# Altium PCB PCB.PcbDoc
Units mm, origin at the board's own origin, x right, y up, seen from the top; angles counter-clockwise.
Board outline 38.61 x 38.61 mm, 2 copper layers (Top Layer, Bottom Layer), stack 1.571 mm thick; 10 components, 100 nets, 222 pads, 11 vias.
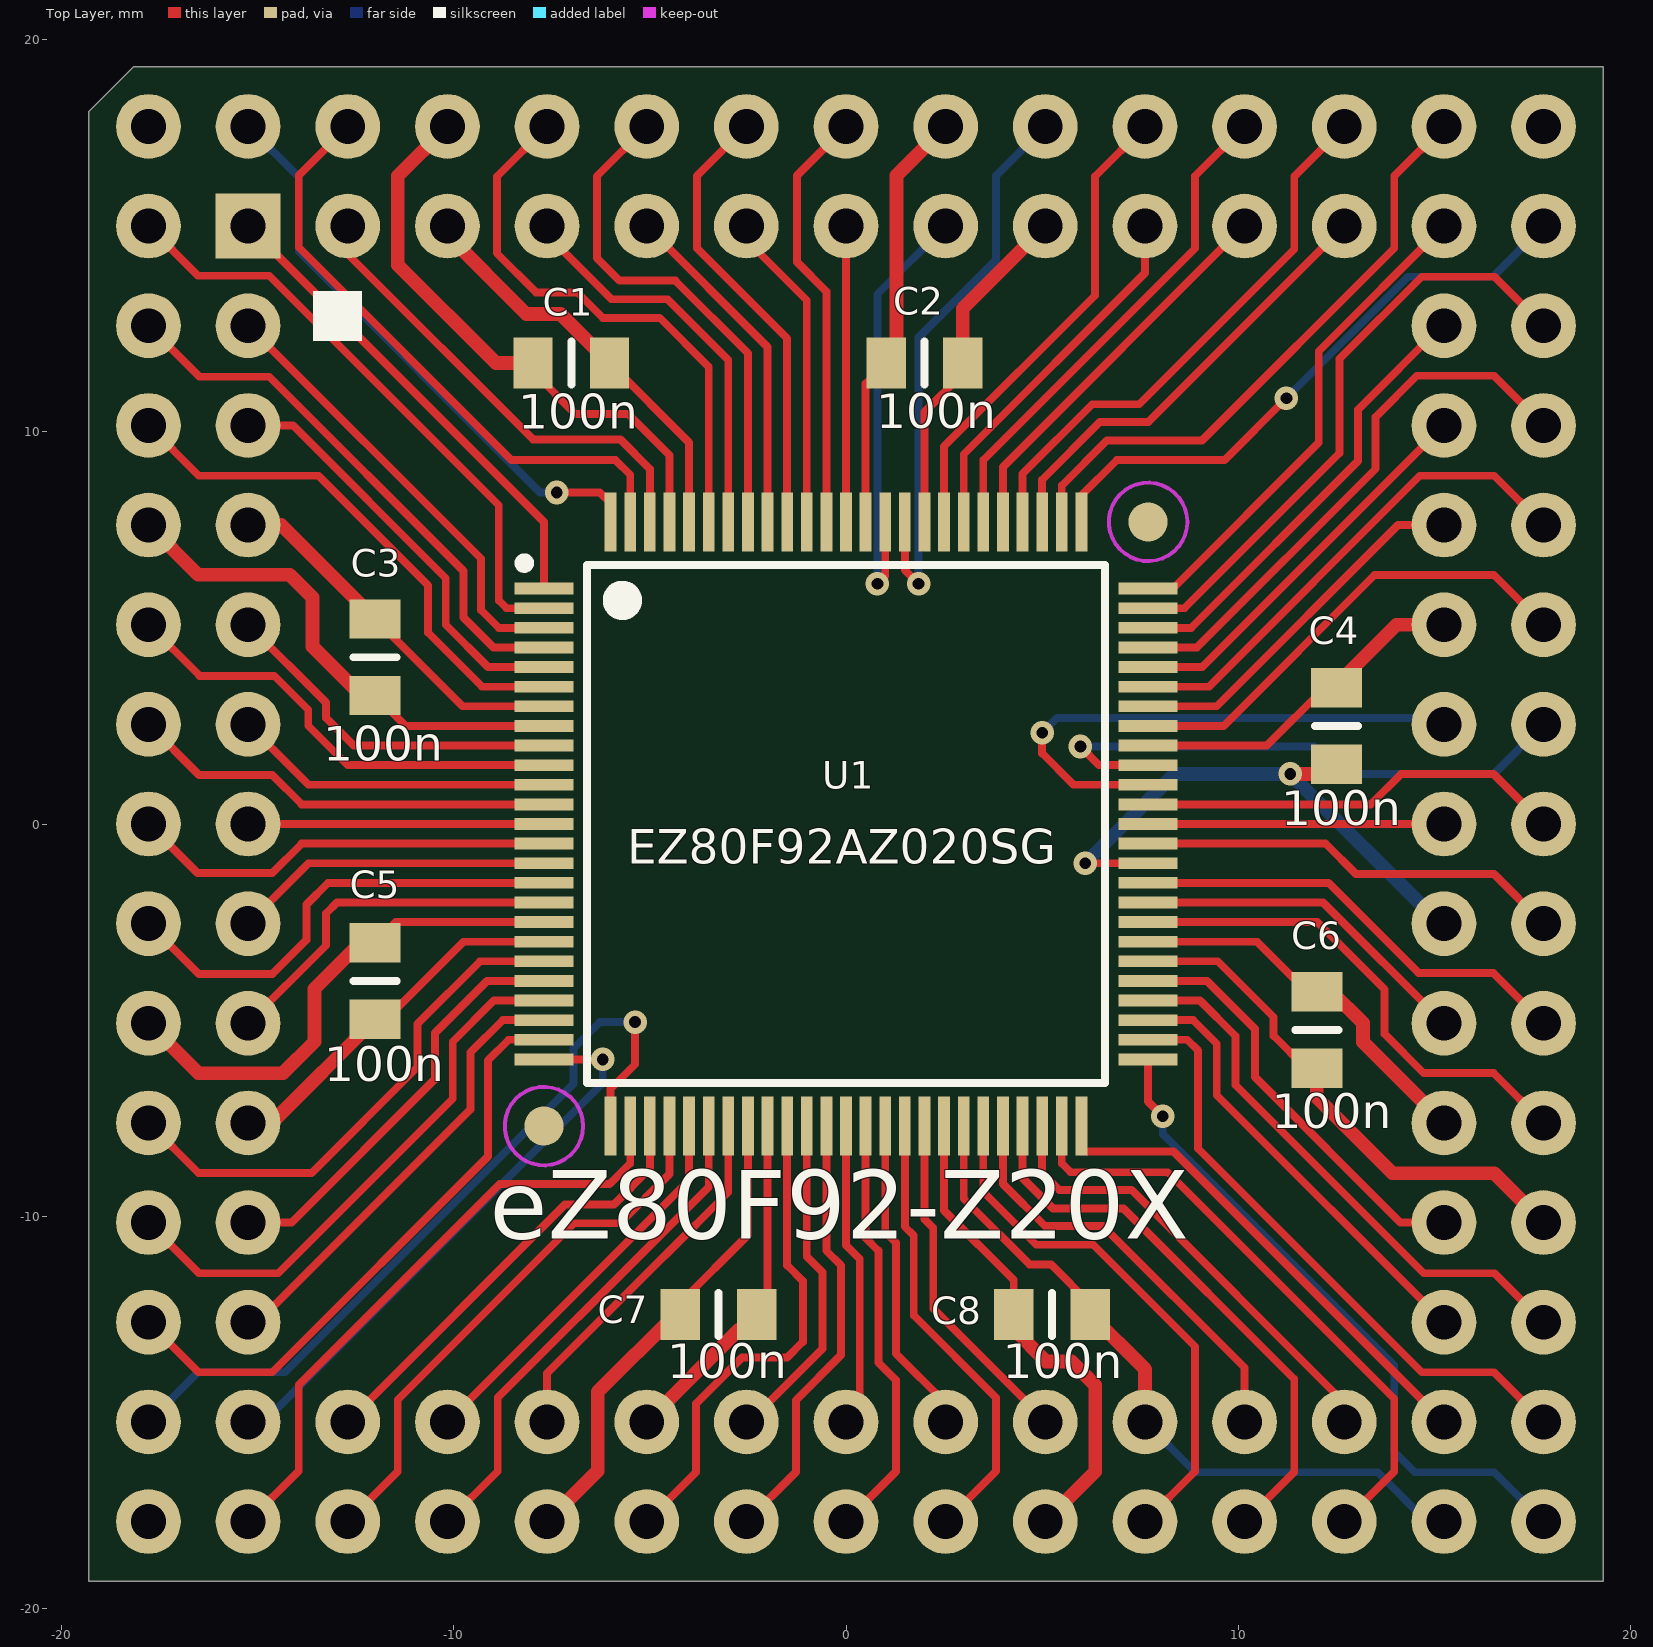
[diagram p0: Top Layer view]
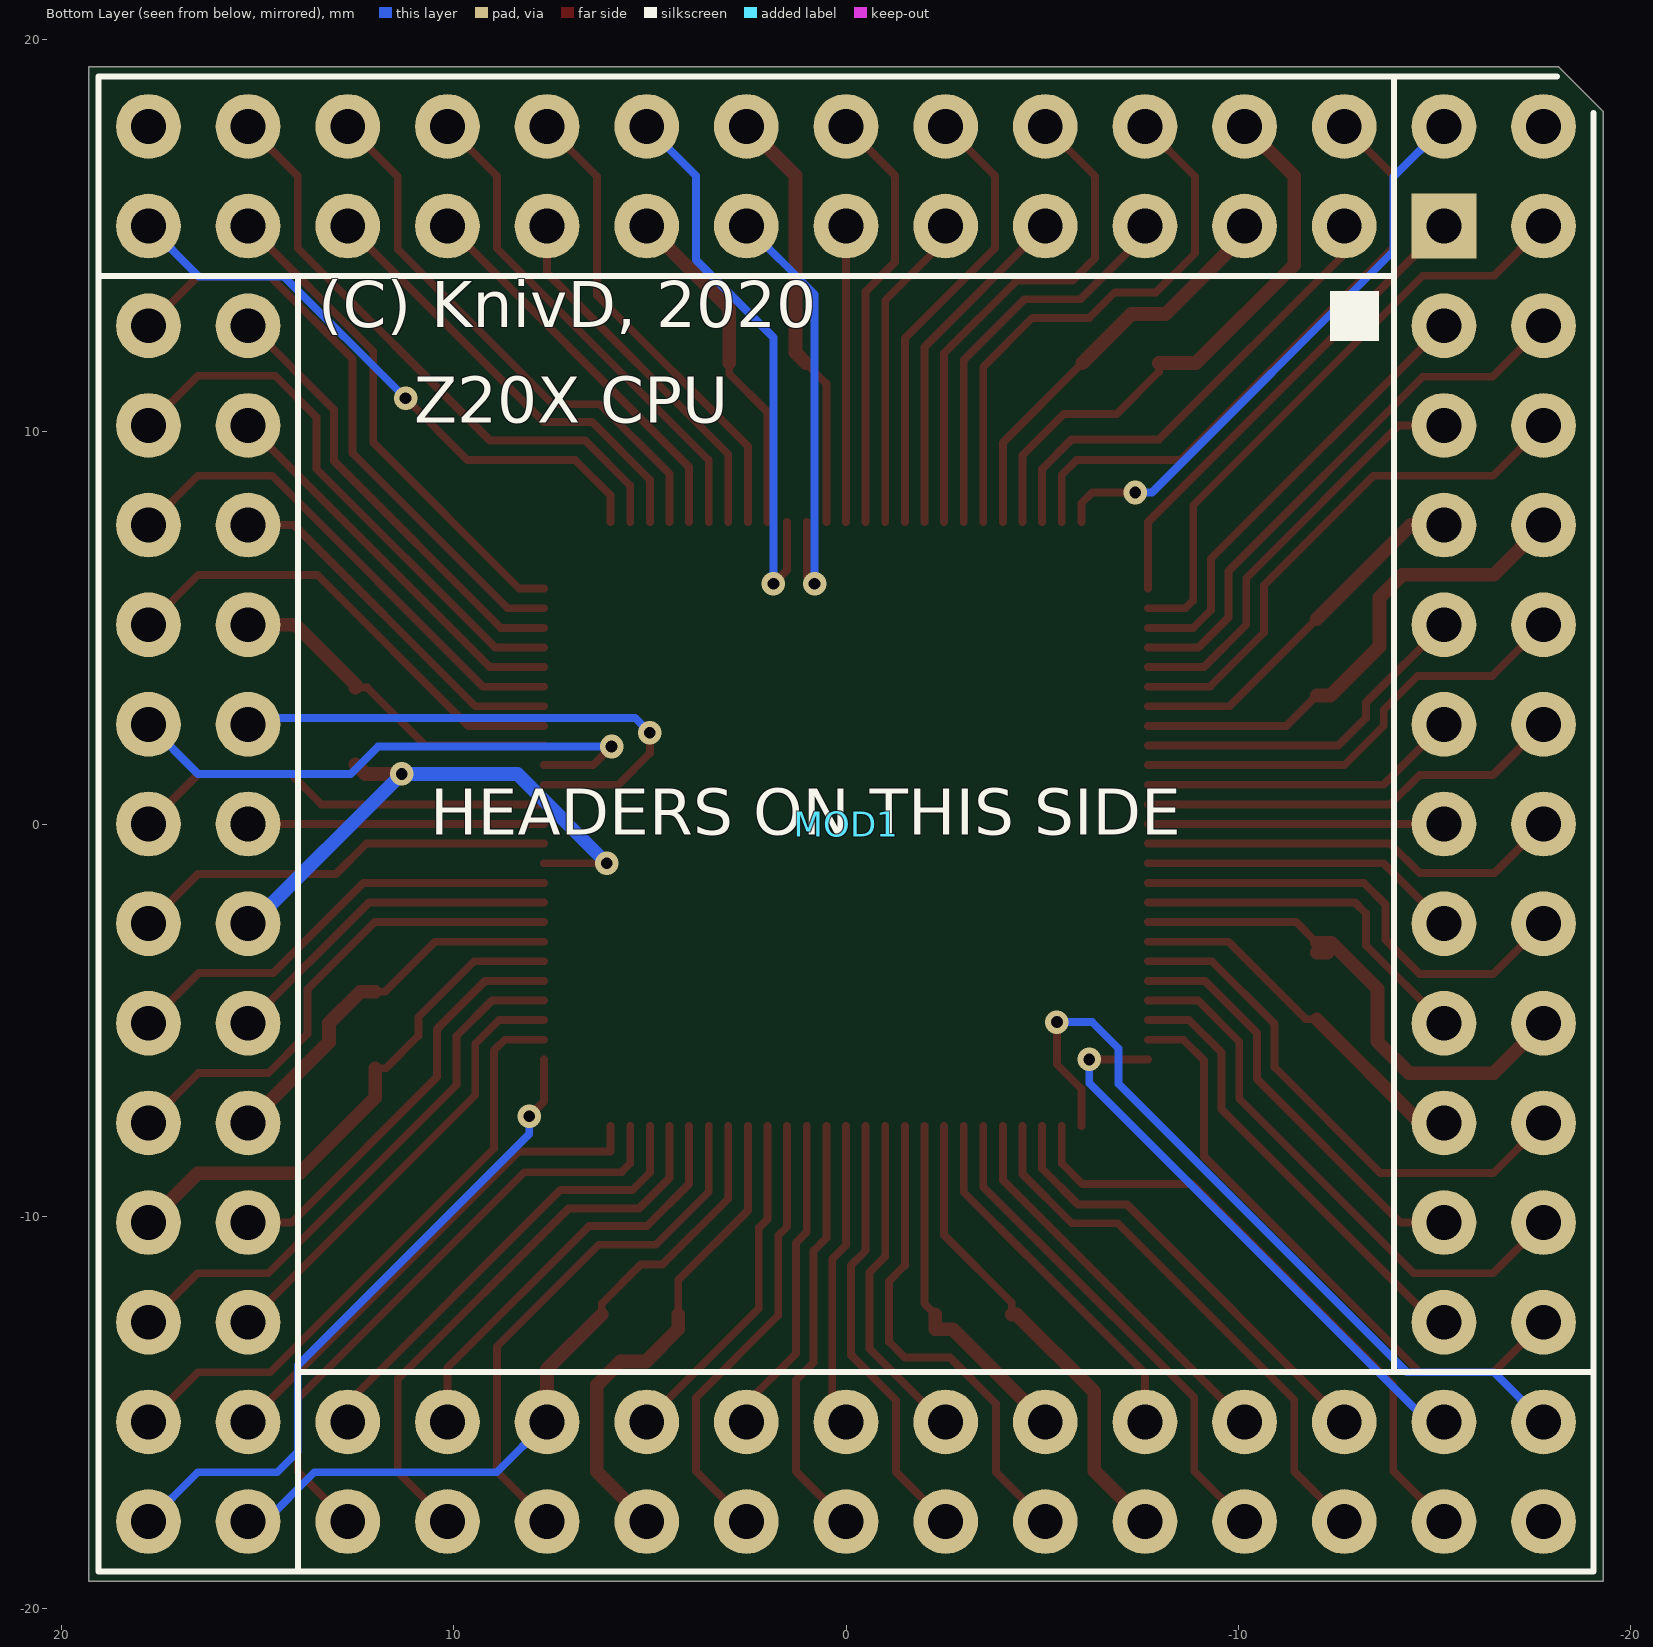
[diagram p1: Bottom Layer view, seen from below]
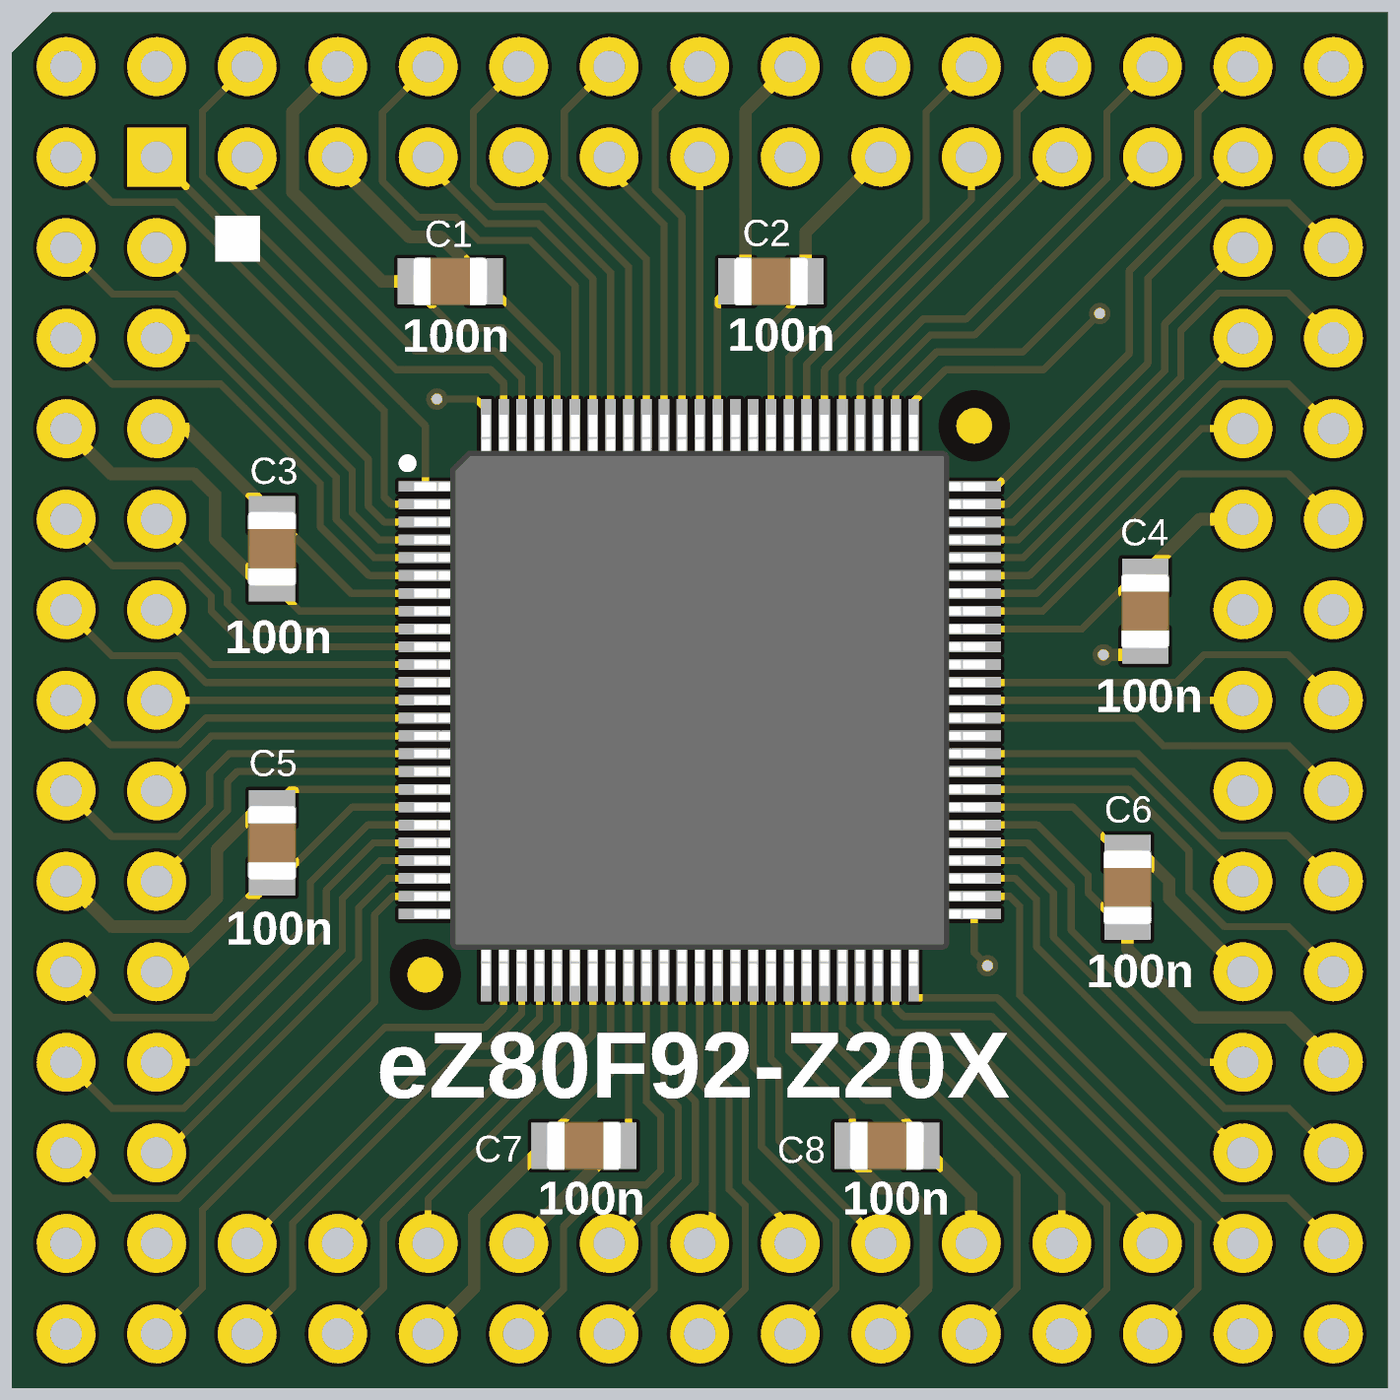
[diagram p2: 3D render of the assembled board from above, using the file's embedded part models]

## Layer stack, top to bottom
Top Solder: solder mask 0.0102, Solder Resist, Dk 3.5
Top Layer: signal copper 0.0356
Dielectric 1: core 1.5, FR-4, Dk 4.2
Bottom Layer: signal copper 0.0356
Solder Side: solder mask 0.0102, Solder Resist, Dk 3.5

## Board outline
-19.304,-19.304 -19.304,18.161 -18.161,19.304 19.304,19.304 19.304,-19.304

## Design rules (kind name [scope] priority, off if disabled: settings)
Clearance Clearance_Poly [(IsRegion)] p1: gap=0.35 ignorepadtopadclearanceinfootprint=TRUE
Clearance [All] p2: gap=0.25 ignorepadtopadclearanceinfootprint=TRUE
DiffPairsRouting [All] p1: maxlimit=1 minlimit=0.15 mostfreqgap=0.2 toplayer_minwidth=0.2 toplayer_maxwidth=1 toplayer_prefwidth=0.2 bottomlayer_minwidth=0.2 bottomlayer_maxwidth=1 bottomlayer_prefwidth=0.2 maxuncoupledlength=12.7
HoleSize [All] p1 off: absolutevalues=TRUE maxlimit=2.5 minlimit=0.025 maxpercent=80.000 minpercent=20.000
HoleToHoleClearance [All] p1 off: gap=0 allowstackedmicrovias=TRUE
LayerPairs [All] p1 off: enforce=TRUE
MaxMinImpedance [InNet('ANT50R')] p1: minimum=49.90 maximum=50.10
MinimumSolderMaskSliver [All] p1 off: minsoldermaskwidth=-50
NetAntennae [All] p1 off: netantennaetolerance=0
PlaneClearance [All] p1: clearance=0.5
PlaneConnect [All] p1: planeconnectstyle=Direct reliefexpansion=0.5 reliefentries=4 reliefconductorwidth=0.35 reliefairgap=0.35
PolygonConnect [All] p1: thpad.connectstyle=Relief thpad.reliefconductorwidth=0.25 thpad.reliefentries=4 thpad.polygonreliefangle="90 Angle" thpad.airgapwidth=0.35 smdpad.connectstyle=Relief smdpad.reliefconductorwidth=0.25 smdpad.reliefentries=4 smdpad.polygonreliefangle="90 Angle" smdpad.airgapwidth=0.35 via.connectstyle=Direct via.reliefconductorwidth=0.35 via.reliefentries=4 via.polygonreliefangle="90 Angle" via.airgapwidth=0.35
RoutingCorners [All] p1: cornerstyle=45-Degree minsetback=2 maxsetback=2
RoutingVias [All] p1: holewidth=0.3 width=0.6 viastyle="Through Hole" minholewidth=0.3 minwidth=0.6 maxholewidth=1 maxwidth=2
SilkToBoardRegionClearance [All] p1 off:
SilkToSilkClearance [All] p1 off: silktosilkclearance=-50
SilkToSolderMaskClearance [IsPad] p1 off: minsilkscreentomaskgap=-50 clearancetoexposedcopper=TRUE
SolderMaskExpansion [All] p1: expansion=0.102
Width [All] p1: maxlimit=0.5 minlimit=0.2 preferedwidth=0.2
18 further rules are at their usual default settings.

## Components (designator, comment, footprint, x,y, rotation, side; value= is the part's Value field where it differs from the comment)
C1 "100n" _0805_CAP -7,11.75 r180 top locked
C2 "100n" _0805_CAP 2,11.75 r180 top locked
C3 "100n" _0805_CAP -12,4.25 r270 top locked
C4 "100n" _0805_CAP 12.5,2.5 r90 top locked
C5 "100n" _0805_CAP -12,-4 r270 top locked
C6 "100n" _0805_CAP 12,-5.25 r90 top locked
C7 "100n" _0805_CAP -3.25,-12.5 r0 top locked
C8 "100n" _0805_CAP 5.25,-12.5 r0 top locked
MOD1 "Z20X CPU Module" PGA100x15 0,0 r0 bottom locked
U1 "EZ80F92AZ020SG" QFP50P1600X1600X170-100N 0,0 r0 top locked

## Footprints (in the part's own frame and the unit in brackets; to place one, negate y for a bottom-side part, rotate by r counter-clockwise, add the part's x,y. Pads: shape width x height; smd on the part's side, far side on the other; paste and mask are expansions set on the pad)
_0805_CAP [mm]
  rect 1x1.3 smd: 1(-0.975,0) 2(0.975,0)
  silkscreen extent 0,-0.55 0,0.55, body extent -1.05,-0.67 1.05,0.68, height 1.1
PGA100x15 [mil] "PGA module, 100 pins, 2.54 pitch"
  rect 65x65 hole 35: 1(-600,-600)
  round 65 hole 35: 2(-700,-600) 3(-600,-500) 4(-700,-500) 5(-600,-400) 6(-700,-400) 7(-600,-300) 8(-700,-300) 9(-600,-200) 10(-700,-200) 11(-600,-100) 12(-700,-100) 13(-600,0) 14(-700,0) 15(-600,100) 16(-700,100) 17(-600,200) 18(-700,200) 19(-600,300) 20(-700,300) 21(-600,400) 22(-700,400) 23(-600,500) 24(-700,500) 25(-600,600) 26(-700,600) 27(-600,700) 28(-500,600) 29(-500,700) 30(-400,600) 31(-400,700) 32(-300,600) 33(-300,700) 34(-200,600) 35(-200,700) 36(-100,600) 37(-100,700) 38(0,600) 39(0,700) 40(100,600) 41(100,700) 42(200,600) 43(200,700) 44(300,600) 45(300,700) 46(400,600) 47(400,700) 48(500,600) 49(500,700) 50(600,600) 51(600,700) 52(700,600) 53(600,500) 54(700,500) 55(600,400) 56(700,400) 57(600,300) 58(700,300) 59(600,200) 60(700,200) 61(600,100) 62(700,100) 63(600,0) 64(700,0) 65(600,-100) 66(700,-100) 67(600,-200) 68(700,-200) 69(600,-300) 70(700,-300) 71(600,-400) 72(700,-400) 73(600,-500) 74(700,-500) 75(600,-600) 76(700,-600) 77(600,-700) 78(500,-600) 79(500,-700) 80(400,-600) 81(400,-700) 82(300,-600) 83(300,-700) 84(200,-600) 85(200,-700) 86(100,-600) 87(100,-700) 88(0,-600) 89(0,-700) 90(-100,-600) 91(-100,-700) 92(-200,-600) 93(-200,-700) 94(-300,-600) 95(-300,-700) 96(-400,-600) 97(-400,-700) 98(-500,-600) 99(-500,-700) 100(-600,-700) 101(-700,-700) 102(-700,700) 103(700,700) 104(700,-700)
  silkscreen extent -535,-535 -486,-485
QFP50P1600X1600X170-100N [mm] "QFP, 0.50mm Pitch, Square; 100 Pin,14.00mm L X 14.00mm W X 1.70mm H Body, IPC Medium Density"
  round 1 smd paste-0.51 mask+0.5: 0(-7.7,-7.7) 0(7.7,7.7)
  rect 1.5x0.3 smd: 1(-7.7,6) 2(-7.7,5.5) 3(-7.7,5) 4(-7.7,4.5) 5(-7.7,4) 6(-7.7,3.5) 7(-7.7,3) 8(-7.7,2.5) 9(-7.7,2) 10(-7.7,1.5) 11(-7.7,1) 12(-7.7,0.5) 13(-7.7,0) 14(-7.7,-0.5) 15(-7.7,-1) 16(-7.7,-1.5) 17(-7.7,-2) 18(-7.7,-2.5) 19(-7.7,-3) 20(-7.7,-3.5) 21(-7.7,-4) 22(-7.7,-4.5) 23(-7.7,-5) 24(-7.7,-5.5) 25(-7.7,-6) 51(7.7,-6) 52(7.7,-5.5) 53(7.7,-5) 54(7.7,-4.5) 55(7.7,-4) 56(7.7,-3.5) 57(7.7,-3) 58(7.7,-2.5) 59(7.7,-2) 60(7.7,-1.5) 61(7.7,-1) 62(7.7,-0.5) 63(7.7,0) 64(7.7,0.5) 65(7.7,1) 66(7.7,1.5) 67(7.7,2) 68(7.7,2.5) 69(7.7,3) 70(7.7,3.5) 71(7.7,4) 72(7.7,4.5) 73(7.7,5) 74(7.7,5.5) 75(7.7,6)
  rect 0.3x1.5 smd: 26(-6,-7.7) 27(-5.5,-7.7) 28(-5,-7.7) 29(-4.5,-7.7) 30(-4,-7.7) 31(-3.5,-7.7) 32(-3,-7.7) 33(-2.5,-7.7) 34(-2,-7.7) 35(-1.5,-7.7) 36(-1,-7.7) 37(-0.5,-7.7) 38(0,-7.7) 39(0.5,-7.7) 40(1,-7.7) 41(1.5,-7.7) 42(2,-7.7) 43(2.5,-7.7) 44(3,-7.7) 45(3.5,-7.7) 46(4,-7.7) 47(4.5,-7.7) 48(5,-7.7) 49(5.5,-7.7) 50(6,-7.7) 76(6,7.7) 77(5.5,7.7) 78(5,7.7) 79(4.5,7.7) 80(4,7.7) 81(3.5,7.7) 82(3,7.7) 83(2.5,7.7) 84(2,7.7) 85(1.5,7.7) 86(1,7.7) 87(0.5,7.7) 88(0,7.7) 89(-0.5,7.7) 90(-1,7.7) 91(-1.5,7.7) 92(-2,7.7) 93(-2.5,7.7) 94(-3,7.7) 95(-3.5,7.7) 96(-4,7.7) 97(-4.5,7.7) 98(-5,7.7) 99(-5.5,7.7) 100(-6,7.7)
  Top Layer keep-out circle w0.1: c-7.7,-7.7 r1
  Top Layer keep-out circle w0.1: c7.7,7.7 r1
  silkscreen extent -8.32,-6.6 6.6,6.77, body extent -8.01,-8.01 8.01,8.01, height 1.7

## Part data
C1 C2 C3 C4 C5 C6 C7 C8: library part Capacitor, "Capacitor"
U1: library part eZ80F92/93, "eZ80Acclaim!® Flash Microcontrollers", Manufacturer=Zilog, Variant="80F92 (128K Flash, 8K RAM); 80F93 (64K Flash, 4K RAM)"

## Via types
v1: diameter 0.6, hole 0.3, Top Layer to Bottom Layer, tented both sides, 11 vias

## Nets (pads, with @x,y where several pads share a name; then routed paths per layer and width w, separated by ;. In a path a pad name is that pad's centre, name@x,y a point inside that pad or via, vN(x,y) a via of type N, cw(c..) or ccw(c..) an arc to the next point about the centre after c; other vN are vias at no path point)
NetC1_1: C1.1 MOD1.96 U1.96 | length 10.6
  Top Layer w0.2: C1.1 -4,9.725 U1.96
  Top Layer w0.35: MOD1.96 -10.16,15.01 -8.15,13 -7.275,13 C1.1
NetC1_2: C1.2 MOD1.97 U1.97 | length 14.8
  Top Layer w0.2: C1.2 -7.975,11.525 -6.9,10.45 -5.55,10.45 -4.5,9.4 U1.97
  Top Layer w0.35: MOD1.97 -11.425,16.515 -11.425,14.25 -8.925,11.75 C1.2
NetC2_1: C2.1 MOD1.84 U1.84 | length 8.8
  Top Layer w0.2: U1.84 2,10.5 2.975,11.475 C2.1
  Top Layer w0.35: C2.1 2.975,13.135 MOD1.84
NetC2_2: C2.2 MOD1.87 U1.87 | length 10.9
  Top Layer w0.2: U1.87 0.5,11.225 C2.2
  Top Layer w0.35: C2.2 1.289,12.015 1.289,16.529 MOD1.87
NetC3_1: C3.1 MOD1.7 U1.7 | length 9.5
  Top Layer w0.2: C3.1 -9.775,3 U1.7
  Top Layer w0.35: MOD1.7 -14.395,7.62 C3.1
NetC3_2: C3.2 MOD1.8 U1.8 | length 12.9
  Top Layer w0.2: C3.2 -11.225,2.5 U1.8
  Top Layer w0.35: MOD1.8 -16.51,6.35 -14.175,6.35 -13.6,5.775 -13.6,4.525 -12.35,3.275 C3.2
NetC4_1: C4.1 MOD1.61 U1.61 | length 14.5
  Top Layer w0.2: v1(6.1,-1) U1.61
  Top Layer w0.35: v1(11.325,1.275) 12.25,1.275 C4.1
  Bottom Layer w0.35: v1(6.1,-1) 8.375,1.275 v1(11.325,1.275) 15.14,-2.54 MOD1.61
NetC4_2: C4.2 MOD1.67 U1.67 | length 8.9
  Top Layer w0.2: U1.67 10.725,2 12.2,3.475 C4.2
  Top Layer w0.35: C4.2 12.5,3.55 14.03,5.08 MOD1.67
NetC5_1: C5.1 MOD1.18 U1.18 | length 13.3
  Top Layer w0.2: C5.1 -11.475,-2.5 U1.18
  Top Layer w0.35: MOD1.18 -16.51,-6.35 -14.35,-6.35 -13.55,-5.55 -13.55,-4.2 -12.375,-3.025 C5.1 ; C5.1@-12.275,-3.275 C5.1@-12,-3.275
NetC5_2: C5.2 MOD1.19 U1.19 | length 9.5
  Top Layer w0.2: C5.2 -11.725,-4.975 -9.75,-3 U1.19
  Top Layer w0.35: MOD1.19 -14.645,-7.62 C5.2
NetC6_1: C6.1 MOD1.56 U1.56 | length 13.6
  Top Layer w0.2: U1.56 9.475,-3.5 10.9,-4.925 10.9,-5.4 11.725,-6.225 C6.1
  Top Layer w0.35: C6.1 12,-6.975 13.925,-8.9 16.52,-8.9 MOD1.56
NetC6_2: C6.2 MOD1.57 U1.57 | length 9.7
  Top Layer w0.2: U1.57 10.475,-3 11.75,-4.275 C6.2
  Top Layer w0.35: C6.2 12.375,-4.275 13.175,-5.075 13.175,-5.555 MOD1.57
NetC7_1: C7.1 MOD1.33 U1.33 | length 12.3
  Top Layer w0.2: C7.1 -4.225,-12.2 -2.5,-10.475 U1.33
  Top Layer w0.35: MOD1.33 -6.331,-16.491 -6.331,-14.481 -4.35,-12.5 C7.1
NetC7_2: C7.2 MOD1.34 U1.34 | length 9.1
  Top Layer w0.2: C7.2 -2,-12.225 U1.34
  Top Layer w0.35: MOD1.34 -2.715,-12.875 -2.275,-12.875 C7.2
NetC8_1: C8.1 MOD1.43 U1.43 | length 12.6
  Top Layer w0.2: U1.43 2.5,-9.85 4.275,-11.625 C8.1
  Top Layer w0.35: C8.1 4.275,-12.875 5.1,-13.7 5.75,-13.7 6.35,-14.3 6.35,-16.51 MOD1.43
NetC8_2: C8.2 MOD1.44 MOD1.51 U1.44 | length 18.4
  Top Layer w0.2: U1.44 3,-9.55 4.675,-11.225 5.225,-11.225 6.225,-12.225 C8.2
  Top Layer w0.35: C8.2 7.62,-13.895 MOD1.44
  Bottom Layer w0.2: MOD1.44 8.905,-16.525 13.55,-16.525 14.805,-17.78 MOD1.51
NetMOD1_1: MOD1.1 U1.1 | length 12.4
  Top Layer w0.2: MOD1.1 -7.7,7.7 U1.1
NetMOD1_2: MOD1.2 U1.2 | length 15.5
  Top Layer w0.2: MOD1.2 -16.515,13.975 -14.7,13.975 -8.85,8.125 -8.85,5.7 -8.65,5.5 U1.2
NetMOD1_3: MOD1.3 U1.3 | length 11.5
  Top Layer w0.2: MOD1.3 -9.3,6.76 -9.3,5.45 -8.85,5 U1.3
NetMOD1_4: MOD1.4 U1.4 | length 14.2
  Top Layer w0.2: MOD1.4 -16.48,11.4 -14.7,11.4 -9.75,6.45 -9.75,5.264 -8.986,4.5 U1.4
NetMOD1_5: MOD1.5 U1.5 | length 10.8
  Top Layer w0.2: MOD1.5 -14.096,10.16 -10.2,6.264 -10.2,5.077 -9.123,4 U1.5
NetMOD1_6: MOD1.6 U1.6 | length 13.5
  Top Layer w0.2: MOD1.6 -16.495,8.875 -13.448,8.875 -10.65,6.077 -10.65,4.875 -9.275,3.5 U1.6
NetMOD1_9: MOD1.9 U1.9 | length 9
  Top Layer w0.2: MOD1.9 -13.255,3.095 -13.255,2.705 -12.55,2 U1.9
NetMOD1_10: MOD1.10 U1.10 | length 11.8
  Top Layer w0.2: MOD1.10 -16.475,3.775 -14.571,3.775 -13.705,2.909 -13.705,2.505 -12.7,1.5 U1.10
NetMOD1_11: MOD1.11 U1.11 | length 8.2
  Top Layer w0.2: MOD1.11 -13.7,1 U1.11
NetMOD1_12: MOD1.12 U1.12 | length 10.9
  Top Layer w0.2: MOD1.12 -16.49,1.25 -14.625,1.25 -13.875,0.5 U1.12
NetMOD1_13: MOD1.13 U1.13 | length 7.5
  Top Layer w0.2: MOD1.13 U1.13
NetMOD1_14: MOD1.14 U1.14 | length 10.9
  Top Layer w0.2: MOD1.14 -16.53,-1.25 -14.625,-1.25 -13.875,-0.5 U1.14
NetMOD1_15: MOD1.15 U1.15 | length 8.2
  Top Layer w0.2: MOD1.15 -13.7,-1 U1.15
NetMOD1_16: MOD1.16 U1.16 | length 12.1
  Top Layer w0.2: MOD1.16 -16.495,-3.825 -14.621,-3.825 -13.75,-2.954 -13.75,-2.05 -13.2,-1.5 U1.16
NetMOD1_17: MOD1.17 U1.17 | length 9.3
  Top Layer w0.2: MOD1.17 -13.25,-3.09 -13.25,-2.275 -12.975,-2 U1.17
NetMOD1_20: MOD1.20 U1.20 | length 13.5
  Top Layer w0.2: MOD1.20 -16.5,-8.9 -13.625,-8.9 -10.925,-6.2 -10.925,-5.1 -9.325,-3.5 U1.20
NetMOD1_21: MOD1.21 U1.21 | length 10.8
  Top Layer w0.2: MOD1.21 -14.135,-10.16 -10.475,-6.5 -10.475,-5.325 -9.15,-4 U1.21
NetMOD1_22: MOD1.22 U1.22 | length 14.3
  Top Layer w0.2: MOD1.22 -16.49,-11.45 -14.475,-11.45 -10.025,-7 -10.025,-5.55 -8.975,-4.5 U1.22
NetMOD1_23: MOD1.23 U1.23 | length 11.6
  Top Layer w0.2: MOD1.23 -15,-12.7 -9.575,-7.275 -9.575,-5.825 -8.75,-5 U1.23
NetMOD1_24: MOD1.24 U1.24 | length 15.6
  Top Layer w0.2: MOD1.24 -16.505,-13.975 -14.625,-13.975 -9.125,-8.475 -9.125,-6.025 -8.6,-5.5 U1.24
NetMOD1_25: MOD1.25 U1.25 | length 14.7
  Top Layer w0.2: U1.25 v1(-6.2,-6)
  Bottom Layer w0.2: MOD1.25 -14.84,-15.24 -6.2,-6.6 v1(-6.2,-6)
NetMOD1_26: MOD1.26 U1.26 | length 20.1
  Top Layer w0.2: U1.26 -6,-6.75 -5.375,-6.125 v1(-5.375,-5.05)
  Bottom Layer w0.2: MOD1.26 -16.515,-13.975 -14.3,-13.975 -6.95,-6.625 -6.95,-5.725 -6.275,-5.05 v1(-5.375,-5.05)
NetMOD1_27: MOD1.27 U1.27 | length 15.8
  Top Layer w0.2: MOD1.27 -13.95,-16.49 -13.95,-14.3 -8.825,-9.175 -6.025,-9.175 -5.5,-8.65 U1.27
NetMOD1_28: MOD1.28 U1.28 | length 11.5
  Top Layer w0.2: MOD1.28 -7.16,-9.7 -5.914,-9.7 -5,-8.786 U1.28
NetMOD1_29: MOD1.29 U1.29 | length 14.2
  Top Layer w0.2: MOD1.29 -11.425,-16.505 -11.425,-14.675 -6.925,-10.175 -5.752,-10.175 -4.5,-8.923 U1.29
NetMOD1_30: MOD1.30 U1.30 | length 10.1
  Top Layer w0.2: MOD1.30 -4,-9.08 U1.30
NetMOD1_31: MOD1.31 U1.31 | length 12.8
  Top Layer w0.2: MOD1.31 -8.875,-16.495 -8.875,-14.619 -4.806,-10.55 -4.8,-10.55 -3.5,-9.25 U1.31
NetMOD1_32: MOD1.32 U1.32 | length 9.5
  Top Layer w0.2: MOD1.32 -7.62,-14 -4.62,-11 -4.614,-11 -3,-9.386 U1.32
NetMOD1_35: MOD1.35 U1.35 | length 12.6
  Top Layer w0.2: MOD1.35 -3.825,-16.525 -3.825,-14.775 -2.65,-13.6 -1.5,-13.6 -1.1,-13.2 -1.1,-11.65 -1.5,-11.25 U1.35
NetMOD1_36: MOD1.36 U1.36 | length 8.6
  Top Layer w0.2: MOD1.36 -2.465,-15.24 -0.6,-13.375 -0.6,-11.425 -1,-11.025 U1.36
NetMOD1_37: MOD1.37 U1.37 | length 11.2
  Top Layer w0.2: MOD1.37 -1.275,-16.515 -1.275,-14.686 -0.125,-13.536 -0.125,-11.25 -0.5,-10.875 U1.37
NetMOD1_38: MOD1.38 U1.38 | length 7.8
  Top Layer w0.2: MOD1.38 0.35,-14.89 0.35,-11.089 0,-10.739 U1.38
NetMOD1_39: MOD1.39 U1.39 | length 10.9
  Top Layer w0.2: MOD1.39 1.275,-16.505 1.275,-14.175 0.825,-13.725 0.825,-10.875 0.5,-10.55 U1.39
NetMOD1_40: MOD1.40 U1.40 | length 8.2
  Top Layer w0.2: U1.40 1,-10.4 1.275,-10.675 1.275,-13.5 2.54,-14.765 MOD1.40
NetMOD1_41: MOD1.41 U1.41 | length 11.6
  Top Layer w0.2: U1.41 1.5,-10.264 1.725,-10.489 1.725,-12.525 3.825,-14.625 3.825,-16.495 MOD1.41
NetMOD1_42: MOD1.42 U1.42 | length 8.8
  Top Layer w0.2: U1.42 2,-10.075 2.225,-10.3 2.225,-12.35 5.08,-15.205 MOD1.42
NetMOD1_45: MOD1.45 U1.45 | length 13.7
  Top Layer w0.2: U1.45 3.5,-9.375 4.85,-10.725 6.3,-10.725 8.9,-13.325 8.9,-16.5 MOD1.45
NetMOD1_46: MOD1.46 U1.46 | length 11
  Top Layer w0.2: U1.46 4,-9.175 5.075,-10.25 6.55,-10.25 10.16,-13.86 MOD1.46
NetMOD1_47: MOD1.47 U1.47 | length 14.5
  Top Layer w0.2: U1.47 4.5,-9.025 5.275,-9.8 7.075,-9.8 11.425,-14.15 11.425,-16.515 MOD1.47
NetMOD1_48: MOD1.48 U1.48 | length 11.8
  Top Layer w0.2: U1.48 5,-8.889 5.436,-9.325 7.275,-9.325 12.7,-14.75 MOD1.48
NetMOD1_49: MOD1.49 U1.49 | length 15.6
  Top Layer w0.2: U1.49 5.5,-8.65 5.725,-8.875 8.2,-8.875 13.975,-14.65 13.975,-16.505 MOD1.49
NetMOD1_50: MOD1.50 U1.50 | length 12.7
  Top Layer w0.2: U1.50 6,-8.35 8.35,-8.35 MOD1.50
NetMOD1_52: MOD1.52 U1.52 | length 15.6
  Top Layer w0.2: U1.52 8.7,-5.5 8.975,-5.775 8.975,-8.275 14.675,-13.975 16.515,-13.975 MOD1.52
NetMOD1_53: MOD1.53 U1.53 | length 11.5
  Top Layer w0.2: U1.53 8.85,-5 9.45,-5.6 9.45,-6.91 MOD1.53
NetMOD1_54: MOD1.54 U1.54 | length 14.2
  Top Layer w0.2: U1.54 9.025,-4.5 9.925,-5.4 9.925,-6.65 14.725,-11.45 16.53,-11.45 MOD1.54
NetMOD1_55: MOD1.55 U1.55 | length 10.8
  Top Layer w0.2: U1.55 9.2,-4 10.425,-5.225 10.425,-6.45 14.135,-10.16 MOD1.55
NetMOD1_58: MOD1.58 U1.58 | length 12.9
  Top Layer w0.2: U1.58 12.01,-2.5 13.725,-4.215 13.725,-5.35 14.725,-6.35 16.51,-6.35 MOD1.58
NetMOD1_59: MOD1.59 U1.59 | length 8.8
  Top Layer w0.2: U1.59 12.16,-2 MOD1.59
NetMOD1_60: MOD1.60 U1.60 | length 11.6
  Top Layer w0.2: U1.60 12.296,-1.5 14.596,-3.8 16.5,-3.8 MOD1.60
NetMOD1_62: MOD1.62 U1.62 | length 10.9
  Top Layer w0.2: U1.62 12.225,-0.5 13,-1.275 16.515,-1.275 MOD1.62
NetMOD1_63: MOD1.63 U1.63 | length 7.5
  Top Layer w0.2: U1.63 MOD1.63
NetMOD1_64: MOD1.64 U1.64 | length 10.9
  Top Layer w0.2: U1.64 13.375,0.5 14.15,1.275 16.505,1.275 MOD1.64
NetMOD1_65: MOD1.65 U1.65 | length 14
  Top Layer w0.2: v1(5,2.325) 5,1.8 5.8,1 U1.65
  Bottom Layer w0.2: v1(5,2.325) 5.375,2.7 15.08,2.7 MOD1.65
NetMOD1_66: MOD1.66 U1.66 | length 14.5
  Top Layer w0.2: v1(5.975,1.975) 6.45,1.5 U1.66
  Bottom Layer w0.2: v1(5.975,1.975) 11.925,1.975 12.625,1.275 16.515,1.275 MOD1.66
NetMOD1_68: MOD1.68 U1.68 | length 12.2
  Top Layer w0.2: U1.68 9.625,2.5 13.475,6.35 16.51,6.35 MOD1.68
NetMOD1_69: MOD1.69 U1.69 | length 9.5
  Top Layer w0.2: U1.69 9.45,3 14.07,7.62 MOD1.69
NetMOD1_70: MOD1.70 U1.70 | length 12.8
  Top Layer w0.2: U1.70 9.25,3.5 14.625,8.875 16.525,8.875 MOD1.70
NetMOD1_71: MOD1.71 U1.71 | length 10.1
  Top Layer w0.2: U1.71 9.08,4 MOD1.71
NetMOD1_72: MOD1.72 U1.72 | length 14.2
  Top Layer w0.2: U1.72 8.944,4.5 13.5,9.056 13.5,10.375 14.55,11.425 16.515,11.425 MOD1.72
NetMOD1_73: MOD1.73 U1.73 | length 11.5
  Top Layer w0.2: U1.73 8.8,5 13.05,9.25 13.05,10.561 15.189,12.7 MOD1.73
NetMOD1_74: MOD1.74 U1.74 | length 15.5
  Top Layer w0.2: U1.74 8.625,5.5 12.575,9.45 12.575,11.85 14.675,13.95 16.53,13.95 MOD1.74
NetMOD1_75: MOD1.75 U1.75 | length 12.7
  Top Layer w0.2: U1.75 8.325,6 12.05,9.725 12.05,12.05 MOD1.75
NetMOD1_76: MOD1.76 U1.76 | length 15.3
  Top Layer w0.2: U1.76 6,8.375 6.9,9.275 9.65,9.275 v1(11.225,10.85)
  Bottom Layer w0.2: v1(11.225,10.85) 14.325,13.95 16.49,13.95 MOD1.76
NetMOD1_77: MOD1.77 U1.77 | length 15.5
  Top Layer w0.2: U1.77 5.5,8.625 6.65,9.775 9.075,9.775 13.975,14.675 13.975,16.515 MOD1.77
NetMOD1_78: MOD1.78 U1.78 | length 11.5
  Top Layer w0.2: U1.78 5,8.775 6.475,10.25 7.71,10.25 MOD1.78
NetMOD1_79: MOD1.79 U1.79 | length 14.2
  Top Layer w0.2: U1.79 4.5,8.925 6.275,10.7 7.475,10.7 11.425,14.65 11.425,16.505 MOD1.79
NetMOD1_80: MOD1.80 U1.80 | length 10.1
  Top Layer w0.2: U1.80 4,9.1 10.14,15.24 MOD1.80
NetMOD1_81: MOD1.81 U1.81 | length 12.8
  Top Layer w0.2: U1.81 3.5,9.275 8.9,14.675 8.9,16.52 MOD1.81
NetMOD1_82: MOD1.82 U1.82 | length 9.5
  Top Layer w0.2: U1.82 3,9.425 7.62,14.045 MOD1.82
NetMOD1_83: MOD1.83 U1.83 | length 12.2
  Top Layer w0.2: U1.83 2.5,9.625 6.35,13.475 6.35,16.51 MOD1.83
NetMOD1_85: MOD1.85 U1.85 | length 14.7
  Top Layer w0.2: U1.85 1.5,6.475 v1(1.85,6.125)
  Bottom Layer w0.2: v1(1.85,6.125) 1.85,12.4 3.825,14.375 3.825,16.525 MOD1.85
NetMOD1_86: MOD1.86 U1.86 | length 11.5
  Top Layer w0.2: v1(0.8,6.125) 1,6.325 U1.86
  Bottom Layer w0.2: v1(0.8,6.125) 0.8,13.5 MOD1.86
NetMOD1_88: MOD1.88 U1.88 | length 7.5
  Top Layer w0.2: U1.88 MOD1.88
NetMOD1_89: MOD1.89 U1.89 | length 10.9
  Top Layer w0.2: U1.89 -0.5,13.575 -1.25,14.325 -1.25,16.53 MOD1.89
NetMOD1_90: MOD1.90 U1.90 | length 8.2
  Top Layer w0.2: MOD1.90 -2.54,14.89 -1,13.35 U1.90
NetMOD1_91: MOD1.91 U1.91 | length 11.6
  Top Layer w0.2: MOD1.91 -3.8,16.52 -3.8,14.675 -1.5,12.375 U1.91
NetMOD1_92: MOD1.92 U1.92 | length 8.8
  Top Layer w0.2: MOD1.92 -2,12.16 U1.92
NetMOD1_93: MOD1.93 U1.93 | length 13
  Top Layer w0.2: MOD1.93 -6.35,16.51 -6.35,14.425 -5.775,13.85 -4.35,13.85 -2.5,12 U1.93
NetMOD1_94: MOD1.94 U1.94 | length 10.3
  Top Layer w0.2: MOD1.94 -7.62,15.02 -5.975,13.375 -4.55,13.375 -3,11.825 U1.94
NetMOD1_95: MOD1.95 U1.95 | length 14.3
  Top Layer w0.2: MOD1.95 -8.9,16.5 -8.9,14.55 -7.9,13.55 -6.85,13.55 -6.2,12.9 -4.75,12.9 -3.5,11.65 U1.95
NetMOD1_98: MOD1.98 U1.98 | length 12
  Top Layer w0.2: MOD1.98 -12.7,14.525 -7.975,9.8 -5.75,9.8 -5,9.05 U1.98
NetMOD1_99: MOD1.99 U1.99 | length 15.7
  Top Layer w0.2: MOD1.99 -13.95,16.53 -13.95,14.7 -8.525,9.275 -5.875,9.275 -5.5,8.9 U1.99
NetMOD1_100: MOD1.100 U1.100 | length 14.8
  Top Layer w0.2: v1(-7.375,8.45) -6.275,8.45 -6,8.175 U1.100
  Bottom Layer w0.2: MOD1.100 -13.95,16.49 -13.95,14.6 -7.8,8.45 v1(-7.375,8.45)
NetMOD1_103: MOD1.103 U1.51 | length 17.1
  Top Layer w0.2: U1.51 7.7,-7.075 v1(8.075,-7.45)
  Bottom Layer w0.2: v1(8.075,-7.45) 8.075,-7.9 13.975,-13.8 13.975,-16 14.5,-16.525 16.525,-16.525 MOD1.103
pads on no net: MOD1.101 MOD1.102 MOD1.104 U1.0

## Silkscreen, mask and mechanical layers (free items; w line width, h text height)
Top Overlay:
  rectangle: -13.589,12.314 -12.339,13.589
  text "eZ80F92-Z20X" at -9.075,-11.15 h3
Bottom Overlay:
  lines w0.15: -19.05,18.125 -19.05,-13.97 -13.97,-13.97 -13.97,19.05 ; -18.125,19.05 -13.97,19.05 ; -13.97,19.05 -13.97,13.97 19.05,13.97 19.05,19.05 -13.97,19.05 ; -19.05,-19.05 -19.05,-13.97 13.97,-13.97 13.97,-19.05 -19.05,-19.05 ; 13.97,-19.05 13.97,13.97 19.05,13.97 19.05,-19.05 13.97,-19.05
  text "(C) KnivD, 2020" at 13.45,12.275 h2
  text "Z20X CPU" at 11,9.85 h2
  text "HEADERS ON THIS SIDE" at 10.6,-0.65 h2